# Altium PCB pcb图.PcbDoc
Units mm, origin at the board's own origin, x right, y up, seen from the top; angles counter-clockwise.
Board outline 100 x 100 mm, 2 copper layers (Top Layer, Bottom Layer); 34 components, 49 nets, 174 pads, 3 vias.
Unrouted connection lines stored in the file: 42.
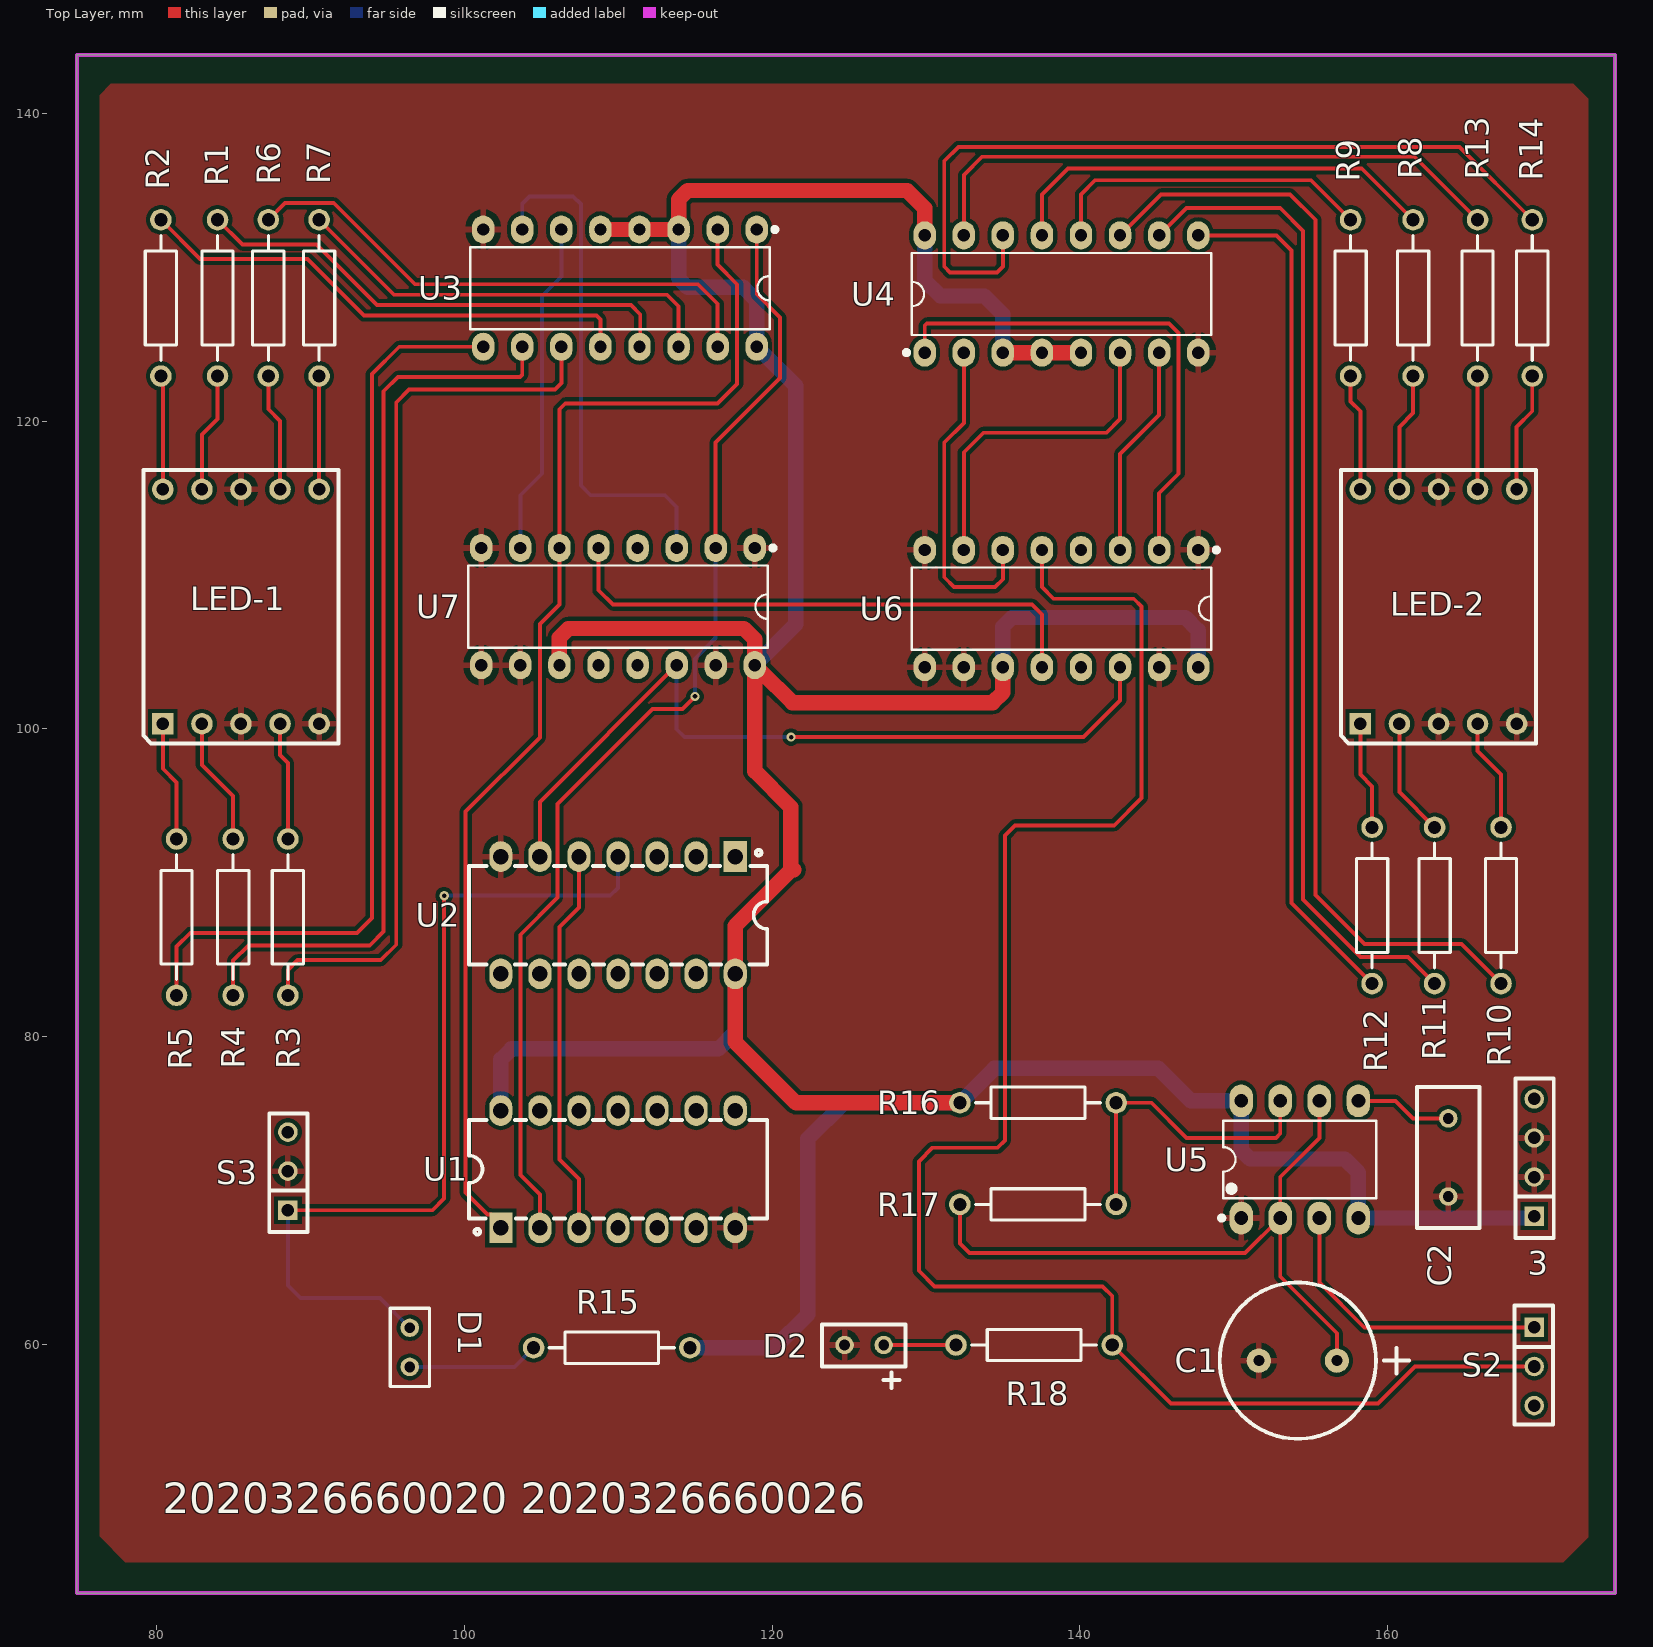
[diagram p0: Top Layer view]
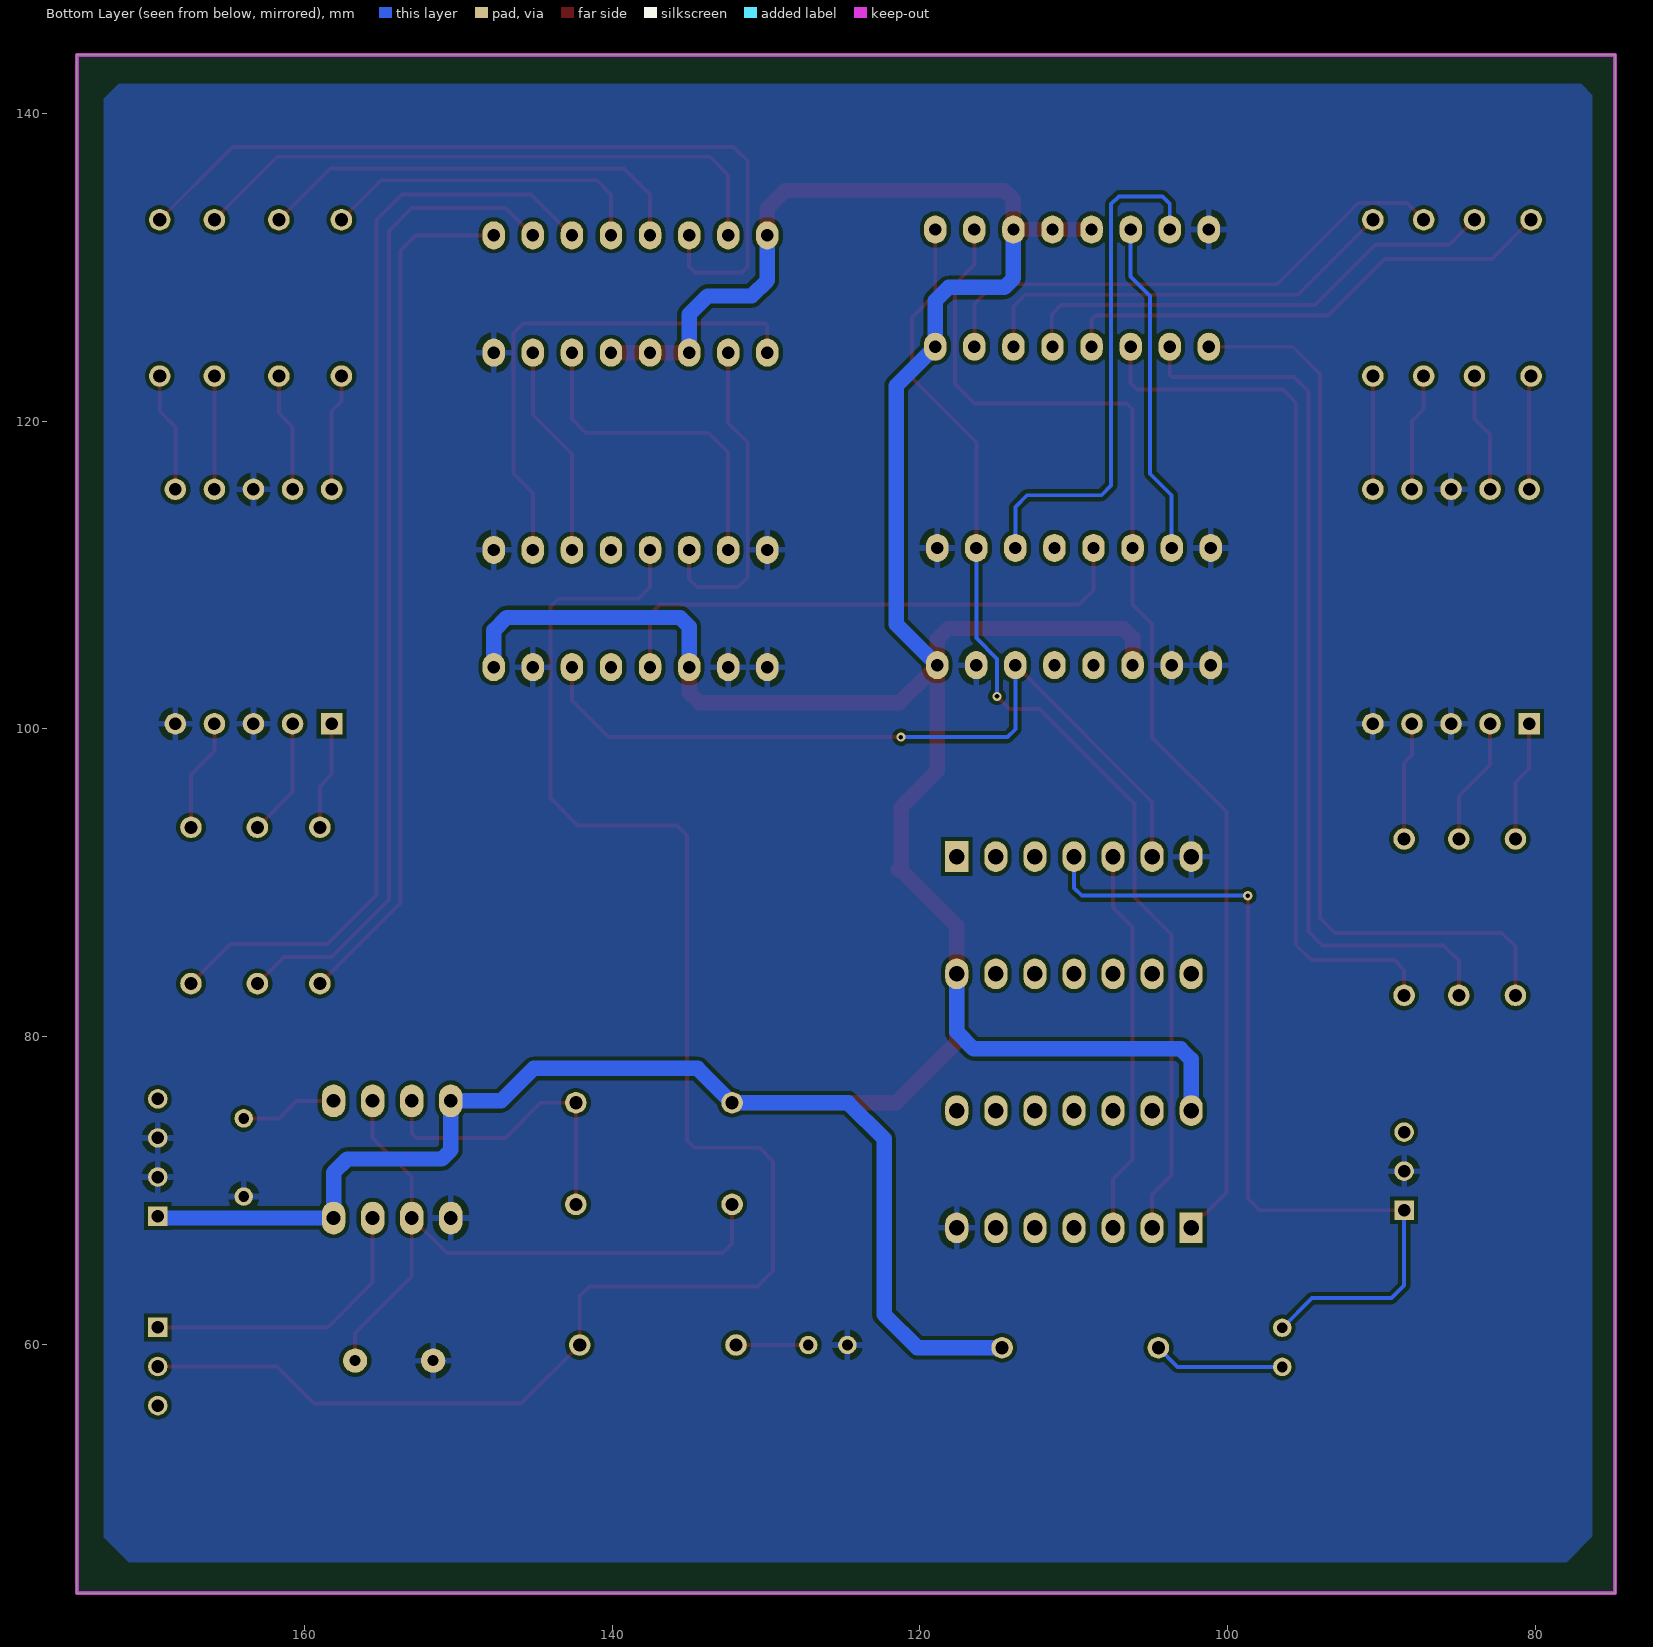
[diagram p1: Bottom Layer view, seen from below]

## Layer stack, top to bottom
Top Solder: solder mask 0.0102, Solder Resist, Dk 3.5
Top Layer: signal copper 0.0356
Dielectric 1: dielectric 0.32, FR-4, Dk 4.8
Bottom Layer: signal copper 0.0356
Bottom Solder: solder mask 0.0102, Solder Resist, Dk 3.5

## Board outline
74.803,43.815 74.803,143.815 174.803,143.815 174.803,43.815

## Design rules (kind name [scope] priority, off if disabled: settings)
Clearance [All] p1: gap=0.254 ignorepadtopadclearanceinfootprint=FALSE
PolygonConnect [All] p1: connectstyle=Relief reliefconductorwidth=0.4 reliefentries=4 polygonreliefangle="90 Angle" airgapwidth=0.4
RoutingVias [All] p1: holewidth=0.3 width=0.6 viastyle="Through Hole" minholewidth=0.3 minwidth=0.6 maxholewidth=0.3 maxwidth=0.6
SilkToSolderMaskClearance [IsPad] p1 off: minsilkscreentomaskgap=0.254 clearancetoexposedcopper=TRUE
SolderMaskExpansion [All] p1: expansion=0.102 istentingtop=FALSE
Width [All] p1: maxlimit=1 minlimit=0.254 preferedwidth=0.254
29 further rules are at their usual default settings.

## Components (designator, comment, footprint, x,y, rotation, side; value= is the part's Value field where it differs from the comment)
3 "=VALUE" SIP4 169.545,68.326 r90 top
C1 "Cap Pol1" RB.2/.4 151.638,58.928 r0 top value=22uF
C2 "" RAD0.2 163.957,72.136 r90 top value=0.01��F
D1 "LED1" RAD-0.1 96.444,59.792 r90 top
D2 "LED1" RAD0.1 125.984,59.944 r180 top
LED-1 "LED" DPY_10-SEG_DP#1 80.391,100.33 r0 top
LED-2 "LED" DPY_10-SEG_DP#2 158.242,100.33 r0 top
R1 "" AXIAL-0.4 83.947,128.016 r90 top value=1K
R2 "" AXIAL-0.4 80.264,128.016 r90 top value=1K
R3 "" AXIAL-0.4 88.519,87.757 r270 top value=1K
R4 "" AXIAL-0.4 84.963,87.757 r270 top value=1K
R5 "" AXIAL-0.4 81.28,87.757 r270 top value=1K
R6 "" AXIAL-0.4 87.249,128.016 r90 top value=1K
R7 "" AXIAL-0.4 90.551,128.016 r90 top value=1K
R8 "" AXIAL-0.4 161.671,128.016 r90 top value=1K
R9 "" AXIAL-0.4 157.607,128.016 r90 top value=1K
R10 "" AXIAL-0.4 167.386,88.519 r270 top value=1K
R11 "" AXIAL-0.4 163.068,88.519 r270 top value=1K
R12 "" AXIAL-0.4 159.004,88.519 r270 top value=1K
R13 "" AXIAL-0.4 165.862,128.016 r90 top value=1K
R14 "" AXIAL-0.4 169.418,128.016 r90 top value=1K
R15 "" AXIAL-0.4 109.576,59.766 r0 top value=1K
R16 "" AXIAL-0.4 137.287,75.692 r180 top value=5K
R17 "" AXIAL-0.4 137.287,69.088 r0 top value=25K
R18 "" AXIAL-0.4 137.033,59.944 r180 top value=1K
S2 "SW-SPST" SIP3 169.545,61.087 r270 top
S3 "SW-SPST" SIP3 88.519,68.707 r90 top
U1 "74LS08" DIP-14 109.982,71.374 r0 top
U2 "74LS32" DIP-14 109.982,87.883 r180 top (schematic designator U2A)
U3 "74LS48" DIP-16 110.109,128.651 r180 top
U4 "74LS48" DIP-16 138.811,128.27 r0 top
U5 "=VALUE" DIP-8 154.305,72.009 r0 top
U6 "74LS192" DIP-16 138.811,107.823 r180 top
U7 "74LS192" DIP-16 109.982,107.95 r180 top

## Footprints (in the part's own frame and the unit in brackets; to place one, negate y for a bottom-side part, rotate by r counter-clockwise, add the part's x,y. Pads: shape width x height; smd on the part's side, far side on the other; paste and mask are expansions set on the pad)
AXIAL-0.4 [mm] "Axial Device, Thru-Hole; 2 Leads; 0.4 in Pin Spacing"
  round 1.4 hole 0.85: 1(-5.08,0) 2(5.08,0)
  silkscreen extent -4.06,-1.02 4.06,1.02
DIP-8 [mm]
  oval 1.524x2.125 hole 0.9: 1(-3.81,-3.81) 2(-1.27,-3.81) 3(1.27,-3.81) 4(3.81,-3.81) 5(3.81,3.81) 6(1.27,3.81) 7(-1.27,3.81) 8(-3.81,3.81)
  silkscreen extent -5.23,-3.96 4.98,2.52
DIP-14 [mm]
  rect 1.5x2 hole 1: 1(-7.62,-3.811)
  oval 1.5x2 hole 1: 2(-5.08,-3.811) 3(-2.54,-3.811) 4(0,-3.811) 5(2.54,-3.811) 6(5.08,-3.811) 7(7.62,-3.811) 8(7.62,3.811) 9(5.08,3.809) 10(2.54,3.809) 11(0,3.809) 12(-2.54,3.809) 13(-5.08,3.809) 14(-7.62,3.809)
  silkscreen extent -9.7,-4.24 9.7,3.2
DIP-16 [mm]
  oval 1.46x1.825 hole 0.8: 1(-8.89,-3.81) 2(-6.35,-3.81) 3(-3.81,-3.81) 4(-1.27,-3.81) 5(1.27,-3.81) 6(3.81,-3.81) 7(6.35,-3.81) 8(8.89,-3.81) 9(8.89,3.81) 10(6.35,3.81) 11(3.81,3.81) 12(1.27,3.81) 13(-1.27,3.81) 14(-3.81,3.81) 15(-6.35,3.81) 16(-8.89,3.81)
  silkscreen extent -10.22,-3.96 9.73,2.67
DPY_10-SEG_DP#1 [mil]
  rect 55x55 hole 32: 1(0,0)
  round 55 hole 32: 2(100,0) 3(200,0) 4(300,0) 5(400,0) 6(0,600) 7(100,600) 8(200,600) 9(300,600) 10(400,600)
  silkscreen extent -50,-50 450,650
DPY_10-SEG_DP#2 [mil]
  rect 55x55 hole 32: 1(0,0)
  round 55 hole 32: 2(100,0) 3(200,0) 4(300,0) 5(400,0) 6(400,600) 7(300,600) 8(200,600) 9(100,600) 10(0,600)
  silkscreen extent -50,-50 450,650
RAD0.1 [mm]
  round 1.2 hole 0.7: 1(-1.27,0) 2(1.27,0)
  silkscreen extent -2.69,-1.33 2.75,2.79
RAD0.2 [mm]
  round 1.2 hole 0.7: 1(-2.54,0) 2(2.54,0)
  silkscreen extent -4.57,-2.03 4.57,2.03
RAD-0.1 [mm] "Radial Cap, Thru-Hole; 2 Leads; 0.1 in Pin Spacing"
  round 1.2 hole 0.7: 1(-1.27,0) 2(1.27,0)
  silkscreen extent -2.54,-1.27 2.54,1.27
RB.2/.4 [mil]
  round 62 hole 28: 1(200,0) 2(0,0)
  silkscreen extent -100,-200 385,200
SIP3 [mil]
  rect 50x50 hole 32: 1(0,0)
  round 50 hole 32: 2(100,0) 3(200,0)
  silkscreen extent -56,-50 248,48
SIP4 [mil]
  rect 50x50 hole 32: 1(0,0)
  round 50 hole 32: 2(100,0) 3(200,0) 4(300,0)
  silkscreen extent -56,-50 352,48

## Part data
3 U5: library part NE555_DIP8, "555 Timer, General-Purpose Single Bipolar Timer", MANF="Texas Instruments", MANF_P#="NE555P, NE555PE4", PARAM="200mA output, 0~70oC", PARAM2=4.5~16V
C1: "Polarized Capacitor (Radial)", LatestRevisionDate=17-Jul-2002, LatestRevisionNote="Re-released for DXP Platform.", PackageDescription="Polarized Capacitor (Radial); 2 Leads", PackageReference=RB7.6-15, Published=8-Jun-2000, Publisher="Altium Limited"
C2: library part Cap, "Capacitor", LatestRevisionDate=17-Jul-2002, LatestRevisionNote="Re-released for DXP Platform.", PackageDescription="Radial Cap, Thru-Hole; 2 Leads; 0.3 in Pin Spacing", PackageReference=RAD-0.3, Published=8-Jun-2000, Publisher="Altium Limited"
D1 D2: "Typical RED GaAs LED", LatestRevisionDate=08-Jul-2005, LatestRevisionNote="Mech Layer 1 removed.", PackageDescription="LED; 2 Leads", PackageReference=LED-1, Published=8-Jun-2000, Publisher="Altium Limited"
R1 R2 R3 R4 R5 R6 R7 R8 R9 R10 R11 R12 R13 R14 R15 R16 R17 R18: library part Res2, "Resistor", LatestRevisionDate=17-Jul-2002, LatestRevisionNote="Re-released for DXP Platform.", PackageDescription="Axial Device, Thru-Hole; 2 Leads; 0.4 in Pin Spacing", PackageReference=AXIAL-0.4, Published=8-Jun-2000, Publisher="Altium Limited"
S2 S3: "Single-Pole, Single-Throw Switch", LatestRevisionDate=17-Jul-2002, LatestRevisionNote="Re-released for DXP Platform.", PackageDescription="Switch; 2 Leads", PackageReference=SPST-2, Published=24-Mar-1999, Publisher="Altium Limited"
U1: "Quad 2-Input Positive-AND Gate"
U2: library part SN74F32D, "Quadruple 2-Input Positive-OR Gate", Code_IPC=SOIC127P600-14, ComponentLink1Description="Manufacturer Link", ComponentLink1URL=http://www.ti.com/, ComponentLink2Description=Datasheet, ComponentLink2URL=http://www-s.ti.com/sc/ds/SN54F32.pdf, DatasheetVersion=May-1999, LatestRevisionDate=13-Apr-2006, LatestRevisionNote="IPC-7351 Footprint Added.", PackageDescription="14-Pin Small Outline Integrated Circuit 1.27 mm Pitch", PackageReference=D014, PackageVersion=Jan-1998, Published=8-Jun-2000, Publisher="Altium Limited"

## Via types
v1: diameter 0.6, hole 0.3, Top Layer to Bottom Layer, 3 vias

## Nets (pads, with @x,y where several pads share a name; then routed paths per layer and width w, separated by ;. In a path a pad name is that pad's centre, name@x,y a point inside that pad or via, vN(x,y) a via of type N, cw(c..) or ccw(c..) an arc to the next point about the centre after c; other vN are vias at no path point)
GND: 3.2 3.3 C1.2 C2.1 D2.2 LED-1.3 LED-1.5 LED-1.8 LED-2.3 LED-2.5 LED-2.8 S3.2 U1.7 U2.7 U3.8 U4.8 U5.1 U6.1 U6.8 U6.9 U6.10 U6.15 U7.1 U7.8 U7.9 U7.10 U7.15
NetC1_1: C1.1 R17.1 U5.2 U5.6 | length 44
  Top Layer w0.254: R17.1 132.207,66.548 132.842,65.913 150.749,65.913 U5.2 ; U5.6 155.575,73.406 153.035,70.866 U5.2 ; C1.1 156.718,60.706 153.035,64.389 U5.2
NetC2_2: C2.2 U5.5 | length 6.3
  Top Layer w0.254: U5.5 160.528,75.819 161.671,74.676 C2.2
NetD1_1: D1.1 R15.1 | length 8.6
  Bottom Layer w0.254: D1.1 103.251,58.522 R15.1
NetD1_2: D1.2 S3.1 U2.4 | length 57.7
  Top Layer w0.254: S3.1 97.917,68.707 98.679,69.469 v1(98.679,89.154)
  Bottom Layer w0.254: S3.1 88.519,63.805 89.332,62.992 94.513,62.992 D1.2 ; v1(98.679,89.154) 109.474,89.154 109.982,89.662 U2.4
NetD2_1: D2.1 R18.2 | length 4.7
  Top Layer w0.254: D2.1 R18.2
NetLED-1_1: LED-1.1 R5.1 | length 7.9
  Top Layer w0.254: LED-1.1 80.391,97.409 81.28,96.52 R5.1
NetLED-1_2: LED-1.2 R4.1 | length 8.3
  Top Layer w0.254: LED-1.2 82.931,97.663 84.963,95.631 R4.1
NetLED-1_4: LED-1.4 R3.1 | length 7.7
  Top Layer w0.254: LED-1.4 88.011,98.298 88.519,97.79 R3.1
NetLED-1_6: LED-1.6 R2.1 | length 7.4
  Top Layer w0.254: R2.1 80.391,122.809 LED-1.6
NetLED-1_7: LED-1.7 R1.1 | length 7.8
  Top Layer w0.254: LED-1.7 82.931,119.126 83.947,120.142 R1.1
NetLED-1_9: LED-1.9 R6.1 | length 7.7
  Top Layer w0.254: R6.1 87.249,120.777 88.011,120.015 LED-1.9
NetLED-1_10: LED-1.10 R7.1 | length 7.4
  Top Layer w0.254: LED-1.10 R7.1
NetLED-2_1: LED-2.1 R12.1 | length 7
  Top Layer w0.254: LED-2.1 158.242,97.028 159.004,96.266 R12.1
NetLED-2_2: LED-2.2 R11.1 | length 7.7
  Top Layer w0.254: LED-2.2 160.782,95.885 R11.1
NetLED-2_4: LED-2.4 R10.1 | length 7.4
  Top Layer w0.254: LED-2.4 165.862,98.552 167.386,97.028 R10.1
NetLED-2_6: LED-2.10 R9.1 | length 7.6
  Top Layer w0.254: R9.1 157.607,121.285 158.242,120.65 LED-2.10
NetLED-2_7: LED-2.9 R8.1 | length 7.7
  Top Layer w0.254: LED-2.9 160.782,119.634 161.671,120.523 R8.1
NetLED-2_9: LED-2.7 R13.1 | length 7.4
  Top Layer w0.254: LED-2.7 R13.1
NetLED-2_10: LED-2.6 R14.1 | length 7.8
  Top Layer w0.254: LED-2.6 168.402,119.634 169.418,120.65 R14.1
NetR1_2: R1.2 U3.13 | length 32.2
  Top Layer w0.254: R1.2 85.565,131.478 90.391,131.478 94.313,127.556 110.821,127.556 111.429,126.948 111.429,124.891 U3.13
NetR2_2: R2.2 U3.12 | length 33
  Top Layer w0.254: R2.2 82.804,130.556 89.789,130.556 93.472,126.873 108.585,126.873 108.839,126.619 U3.12
NetR3_2: R3.2 U3.11 | length 58.2
  Top Layer w0.254: R3.2 88.519,84.328 89.154,84.963 94.56,84.963 95.563,85.966 95.563,121.229 96.405,122.07 105.872,122.07 106.299,122.497 U3.11
NetR4_2: R4.2 U3.10 | length 59.2
  Top Layer w0.254: R4.2 84.963,84.94 85.951,85.928 93.845,85.928 94.748,86.832 94.748,121.948 95.678,122.878 103.61,122.878 103.759,123.027 U3.10
NetR5_2: R5.2 U3.9 | length 60
  Top Layer w0.254: R5.2 81.28,85.843 82.173,86.736 93.017,86.736 93.98,87.699 93.98,123.063 95.758,124.841 U3.9
NetR6_2: R6.2 U3.15 | length 35.2
  Top Layer w0.254: R6.2 88.33,134.177 91.502,134.177 96.774,128.905 115.189,128.905 116.459,127.635 U3.15
NetR7_2: R7.2 U3.14 | length 28.3
  Top Layer w0.254: R7.2 95.425,128.222 113.173,128.222 113.919,127.477 U3.14
NetR8_2: R8.2 U4.13 | length 28.9
  Top Layer w0.254: U4.13 137.541,134.73 139.243,136.432 158.335,136.432 R8.2
NetR9_2: R9.2 U4.12 | length 21.6
  Top Layer w0.254: U4.12 140.081,134.747 141.002,135.668 155.035,135.668 R9.2
NetR10_2: R10.2 U4.11 | length 72.8
  Top Layer w0.254: U4.11 145.288,134.747 153.67,134.747 155.321,133.096 155.321,89.194 158.508,86.007 164.818,86.007 R10.2
NetR11_2: R11.2 U4.10 | length 65
  Top Layer w0.254: U4.10 146.939,133.858 153.035,133.858 154.515,132.378 154.515,88.905 158.25,85.171 161.336,85.171 R11.2
NetR12_2: R12.2 U4.9 | length 56.3
  Top Layer w0.254: U4.9 152.781,132.08 153.776,131.085 153.776,88.667 R12.2
NetR13_2: R13.2 U4.15 | length 39.5
  Top Layer w0.254: U4.15 132.461,136.017 133.636,137.192 161.766,137.192 R13.2
NetR14_2: R14.2 U4.14 | length 53.6
  Top Layer w0.254: U4.14 135.001,130.048 134.62,129.667 131.572,129.667 131.191,130.048 131.191,136.906 132.112,137.827 164.687,137.827 R14.2
NetR16_1: R16.1 R17.2 U5.7 | length 20.5
  Top Layer w0.254: R17.2 R16.1 144.653,75.692 146.939,73.406 152.758,73.406 153.035,73.683 U5.7
NetR18_1: R18.1 S2.2 U6.5 | length 111.3
  Top Layer w0.254: U6.5 137.541,109.22 138.303,108.458 143.51,108.458 144.018,107.95 144.018,95.504 142.24,93.726 135.788,93.726 135.128,93.066 135.128,80.188 135.128,73.228 134.671,72.771 130.429,72.771 129.54,71.882 129.54,64.77 130.556,63.754 141.482,63.754 142.113,63.123 R18.1 145.923,56.134 159.385,56.134 161.798,58.547 S2.2
NetS2_1: S2.1 U5.3 | length 19.4
  Top Layer w0.254: U5.3 155.575,64.006 158.494,61.087 S2.1
NetU1_1: U1.1 U3.2 U7.6 | length 79.6
  Top Layer w0.254: U1.1 102.362,67.813 101.739,68.436 101.489,68.436 100.076,69.849 100.076,94.615 104.902,99.441 104.902,106.807 106.172,108.077 U7.6 106.172,120.777 106.553,121.158 116.459,121.158 117.729,122.428 117.729,128.905 116.459,130.175 U3.2
NetU1_2: U1.2 U3.1 U7.2 | length 74.2
  Top Layer w0.254: U1.2 104.902,69.723 103.632,70.993 103.632,86.614 106.045,89.027 106.045,95.121 112.224,101.299 114.177,101.299 v1(114.986,102.108) ; U7.2 116.332,118.618 120.523,122.809 120.523,126.746 118.999,128.27 U3.1
  Bottom Layer w0.254: v1(114.986,102.108) v1(114.986,102.108) 114.987,104.549 116.332,105.894 U7.2
NetU1_3: U1.3 U2.5 | length 25.2
  Top Layer w0.254: U1.3 107.442,70.739 106.172,72.009 106.172,87.122 107.442,88.392 U2.5
NetU2A_6: U2.6 U6.14 U7.14 | length 52.5
  Top Layer w0.254: U2.6 104.902,95.25 U7.14 ; v1(121.234,99.466) 140.233,99.466 142.621,101.854 U6.14
  Bottom Layer w0.254: U7.14 113.792,99.974 114.299,99.466 v1(121.234,99.466)
NetU3_6: U3.6 U7.7 | length 21.8
  Bottom Layer w0.254: U7.7 103.632,115.189 105.029,116.586 105.029,128.143 106.299,129.413 U3.6
NetU3_7: U3.7 U7.3 | length 33.7
  Bottom Layer w0.254: U3.7 103.759,134.146 104.233,134.62 107.061,134.62 107.569,134.112 107.569,115.824 108.204,115.189 113.03,115.189 113.792,114.427 U7.3
NetU4_1: U4.1 U6.2 | length 33.2
  Top Layer w0.254: U4.1 129.921,126.216 130.07,126.365 145.796,126.365 146.431,125.73 146.431,116.586 145.161,115.316 U6.2
NetU4_2: U4.2 U6.6 | length 21.3
  Top Layer w0.254: U4.2 132.461,119.888 131.191,118.618 131.191,109.855 131.826,109.22 134.493,109.22 135.001,109.728 U6.6
NetU4_6: U4.6 U6.7 | length 21.7
  Top Layer w0.254: U6.7 132.461,117.983 133.731,119.253 141.732,119.253 142.621,120.142 U4.6
NetU4_7: U4.7 U6.3 | length 13.9
  Top Layer w0.254: U6.3 142.621,117.856 145.161,120.396 U4.7
NetU6_12: U6.12 U7.5 | length 35.7
  Top Layer w0.254: U7.5 108.712,109.009 109.644,108.077 136.906,108.077 137.541,107.442 U6.12
VCC: 3.1 R15.2 R16.2 U1.14 U2.14 U3.3 U3.4 U3.5 U3.16 U4.3 U4.4 U4.5 U4.16 U5.4 U5.8 U6.11 U6.16 U7.11 U7.16 | length 273.9
  Top Layer w1: U7.11 106.172,105.942 106.758,106.528 118.161,106.528 118.872,105.816 U7.16 118.872,104.082 119.226,103.728 119.284,103.728 121.31,101.702 134.341,101.702 135.001,102.362 U6.11 ; U3.5 U3.4 U3.3 113.919,134.415 114.505,135.001 128.778,135.001 129.921,133.858 U4.16 ; U7.16@118.872,103.728 118.872,97.257 121.209,94.92 121.209,91.043 121.421,90.831 ; 121.334,90.919 117.602,87.187 U2.14 117.602,79.654 121.564,75.692 R16.2 ; U4.3 U4.4 U4.5
  Bottom Layer w1: U1.14@102.362,75.069 U1.14 102.362,78.511 103.048,79.197 116.51,79.197 117.602,80.289 U2.14 ; U3.3 113.919,129.288 114.505,128.702 118.135,128.702 118.999,127.838 U3.16 118.999,124.783 119.353,124.429 119.411,124.429 121.539,122.301 121.539,106.807 119.284,104.552 119.226,104.552 118.872,104.198 U7.16 ; R15.2 120.167,59.766 122.326,61.925 122.326,73.355 124.663,75.692 R16.2 134.442,77.927 145.11,77.927 147.218,75.819 U5.8 150.495,72.62 151.081,72.034 157.226,72.034 158.115,71.145 U5.4 169.418,68.199 3.1 ; U4.16 129.921,129.159 130.937,128.143 133.807,128.143 135.001,126.949 U4.3 ; U6.11 135.001,106.653 135.587,107.239 146.863,107.239 147.701,106.401 U6.16
pads on no net: 3.4 S2.3 S3.3 U1.4 U1.5 U1.6 U1.8 U1.9 U1.10 U1.11 U1.12 U1.13 U2.1 U2.2 U2.3 U2.8 U2.9 U2.10 U2.11 U2.12 U2.13 U6.4 U6.13 U7.4 U7.12 U7.13

## Polygon pours and split planes (outlines as drawn)
GND on Top Layer "NONET_L01_P-001" (solid, pour order 1): 173.05,47.447 173.05,140.97 172.085,141.935 77.013,141.935 76.276,141.199 76.276,47.498 77.953,45.822 171.425,45.822
GND on Bottom Layer "NONET_L01_P-001" (solid, pour order 0): 172.085,141.935 173.05,140.97 173.05,47.447 171.425,45.822 77.953,45.822 76.276,47.498 76.276,141.199 77.013,141.935

## Keep-outs
Keep-Out Layer:
  the board outline again, w0.254

## Silkscreen, mask and mechanical layers (free items; w line width, h text height)
Top Overlay:
  text "2020326660020 2020326660026" at 80.391,48.997 h2